# Altium PCB ruler.PcbDoc (part 2 of 2)
Units mm, origin at the board's own origin, x right, y up, seen from the top; angles counter-clockwise.
Board outline 304.8 x 31.75 mm, 2 copper layers (Top Layer, Bottom Layer); 31 components, 41 nets, 152 pads, 99 vias.
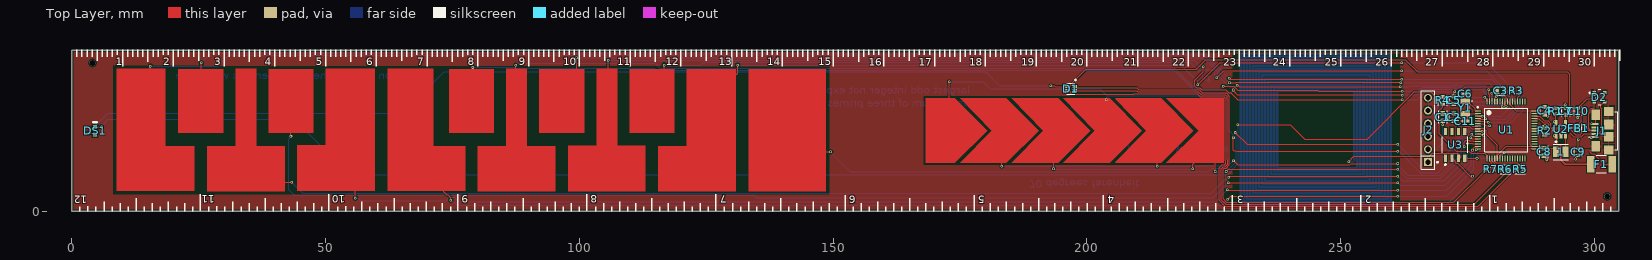
[diagram p0: Top Layer view]

## Other copper (continued)
Bottom Layer: (continued)
  text "pi" at 224.41,25.632 h1.52
  text "largest odd integer not expressible" at 177.038,23.114 h1.52
  text "as the sum of three primes" at 177.038,20.574 h1.52
  text "root 2" at 276.11,18.034 h1.52
  text "year this was made" at 207.754,12.7 h1.52 r180
  text "70 degrees farenheit" at 188.629,6.096 h1.52 r180
  text "e" at 28.067,5.461 h1.52 r180

## Silkscreen, mask and mechanical layers (free items; w line width, h text height)
Top Overlay:
  drawing of 496 lines, arcs and shapes, not listed
  text "1" at 8.654,28.781 h1.52
  text "2" at 18.054,28.781 h1.52
  text "3" at 28.054,28.781 h1.52
  text "4" at 38.054,28.781 h1.52
  text "5" at 48.054,28.781 h1.52
  text "6" at 58.054,28.781 h1.52
  text "7" at 68.054,28.781 h1.52
  text "8" at 78.054,28.781 h1.52
  text "9" at 88.054,28.781 h1.52
  text "10" at 96.854,28.781 h1.52
  text "11" at 107.454,28.781 h1.52
  text "12" at 117.054,28.781 h1.52
  text "13" at 127.454,28.781 h1.52
  text "14" at 137.054,28.781 h1.52
  text "15" at 147.054,28.781 h1.52
  text "16" at 157.054,28.654 h1.52
  text "17" at 166.854,28.654 h1.52
  text "18" at 176.854,28.654 h1.52
  text "19" at 187.054,28.654 h1.52
  text "20" at 196.854,28.654 h1.52
  text "21" at 207.254,28.654 h1.52
  text "22" at 216.854,28.654 h1.52
  text "23" at 226.854,28.654 h1.52
  text "24" at 236.654,28.654 h1.52
  text "25" at 246.854,28.654 h1.52
  text "26" at 256.854,28.654 h1.52
  text "27" at 266.654,28.654 h1.52
  text "28" at 276.854,28.654 h1.52
  text "29" at 286.854,28.654 h1.52
  text "30" at 296.854,28.654 h1.52
  text "11" at 28.194,3.175 h1.52 r180
  text "10" at 53.848,3.175 h1.52 r180
  text "9" at 78.105,3.175 h1.52 r180
  text "8" at 103.505,3.175 h1.52 r180
  text "7" at 129.032,3.175 h1.52 r180
  text "12" at 3.048,3.048 h1.52 r180
  text "6" at 154.432,3.048 h1.52 r180
  text "5" at 179.832,3.048 h1.52 r180
  text "4" at 205.359,3.048 h1.52 r180
  text "3" at 230.886,3.048 h1.52 r180
  text "2" at 256.159,3.048 h1.52 r180
  text "1" at 281.051,3.048 h1.52 r180
Bottom Overlay:
  drawing of 501 lines, arcs and shapes, not listed
  text "12" at 3.175,28.702 h1.52
  text "11" at 23.876,28.702 h1.52
  text "10" at 49.657,28.702 h1.52
  text "9" at 74.803,28.702 h1.52
  text "8" at 100.457,28.702 h1.52
  text "7" at 125.73,28.702 h1.52
  text "6" at 151.13,28.702 h1.52
  text "5" at 176.53,28.575 h1.52
  text "4" at 201.93,28.575 h1.52
  text "3" at 227.203,28.575 h1.52
  text "2" at 252.476,28.575 h1.52
  text "1" at 277.749,28.575 h1.52
  text "16" at 157.054,3.146 h1.52 r180
  text "17" at 166.854,3.146 h1.52 r180
  text "18" at 176.854,3.146 h1.52 r180
  text "19" at 187.054,3.146 h1.52 r180
  text "20" at 196.854,3.146 h1.52 r180
  text "21" at 207.254,3.146 h1.52 r180
  text "22" at 216.854,3.146 h1.52 r180
  text "23" at 226.854,3.146 h1.52 r180
  text "24" at 236.654,3.146 h1.52 r180
  text "25" at 246.854,3.146 h1.52 r180
  text "26" at 256.854,3.146 h1.52 r180
  text "27" at 266.654,3.146 h1.52 r180
  text "28" at 276.854,3.146 h1.52 r180
  text "29" at 286.854,3.146 h1.52 r180
  text "30" at 296.854,3.146 h1.52 r180
  text "1" at 8.654,3.019 h1.52 r180
  text "2" at 18.054,3.019 h1.52 r180
  text "3" at 28.054,3.019 h1.52 r180
  text "4" at 38.054,3.019 h1.52 r180
  text "5" at 48.054,3.019 h1.52 r180
  text "6" at 58.054,3.019 h1.52 r180
  text "7" at 68.054,3.019 h1.52 r180
  text "8" at 78.054,3.019 h1.52 r180
  text "9" at 88.054,3.019 h1.52 r180
  text "10" at 96.854,3.019 h1.52 r180
  text "11" at 107.454,3.019 h1.52 r180
  text "12" at 117.054,3.019 h1.52 r180
  text "13" at 127.454,3.019 h1.52 r180
  text "14" at 137.054,3.019 h1.52 r180
  text "15" at 147.054,3.019 h1.52 r180
Bottom Solder:
  text "fraction through the year when this was made" at 68.431,26.035 h1.52
  text "pi" at 224.409,25.654 h1.52
  text "largest odd integer not expressible" at 177.038,23.114 h1.52
  text "as the sum of three primes" at 177.038,20.574 h1.52
  text "root 2" at 276.098,18.034 h1.52
  text "year this was made" at 207.754,12.7 h1.52 r180
  text "70 degrees farenheit" at 188.629,6.096 h1.52 r180
  text "e" at 28.067,5.461 h1.52 r180